# Altium PCB PCB1.PcbDoc
Units mm, origin at the board's own origin, x right, y up, seen from the top; angles counter-clockwise.
Board outline 83.19 x 63.37 mm, 2 copper layers (Top Layer, Bottom Layer); 32 components, 21 nets, 118 pads, 2 vias.
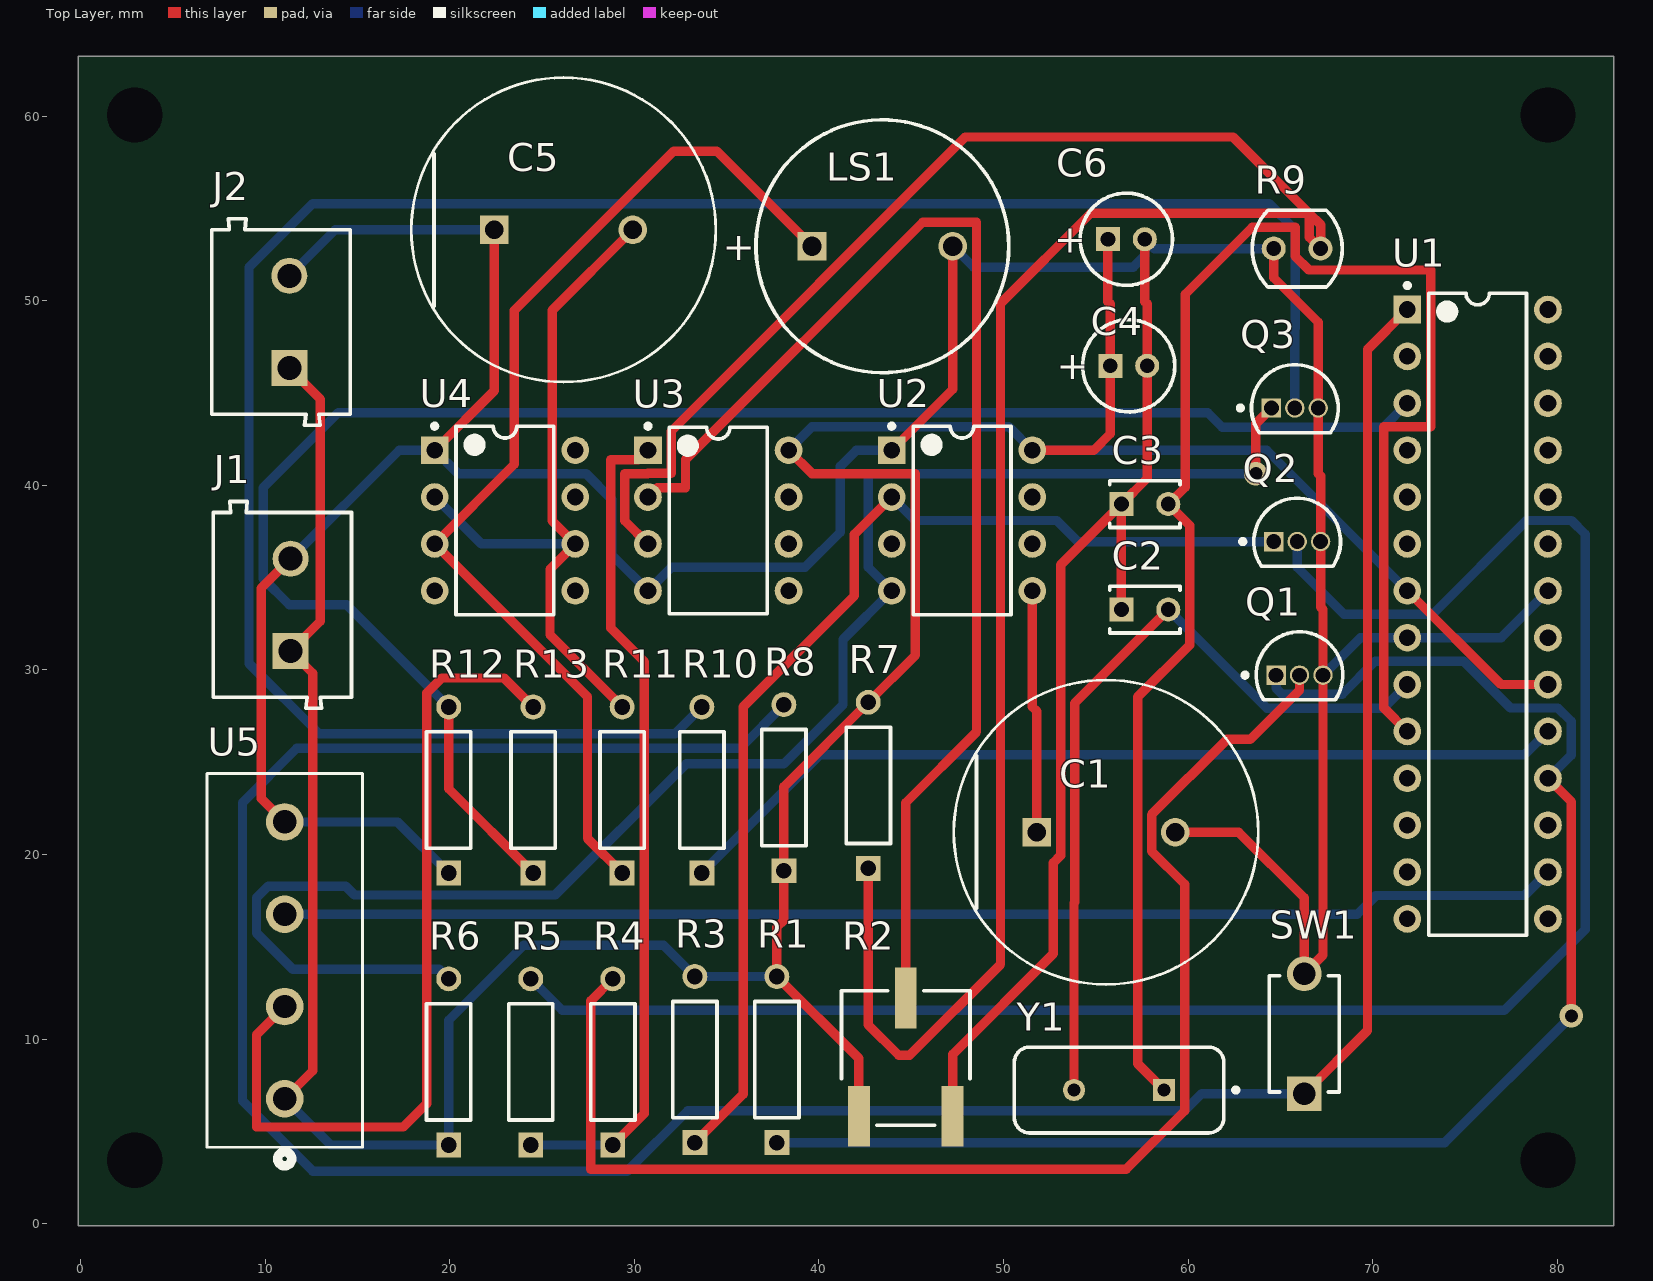
[diagram p0: Top Layer view]
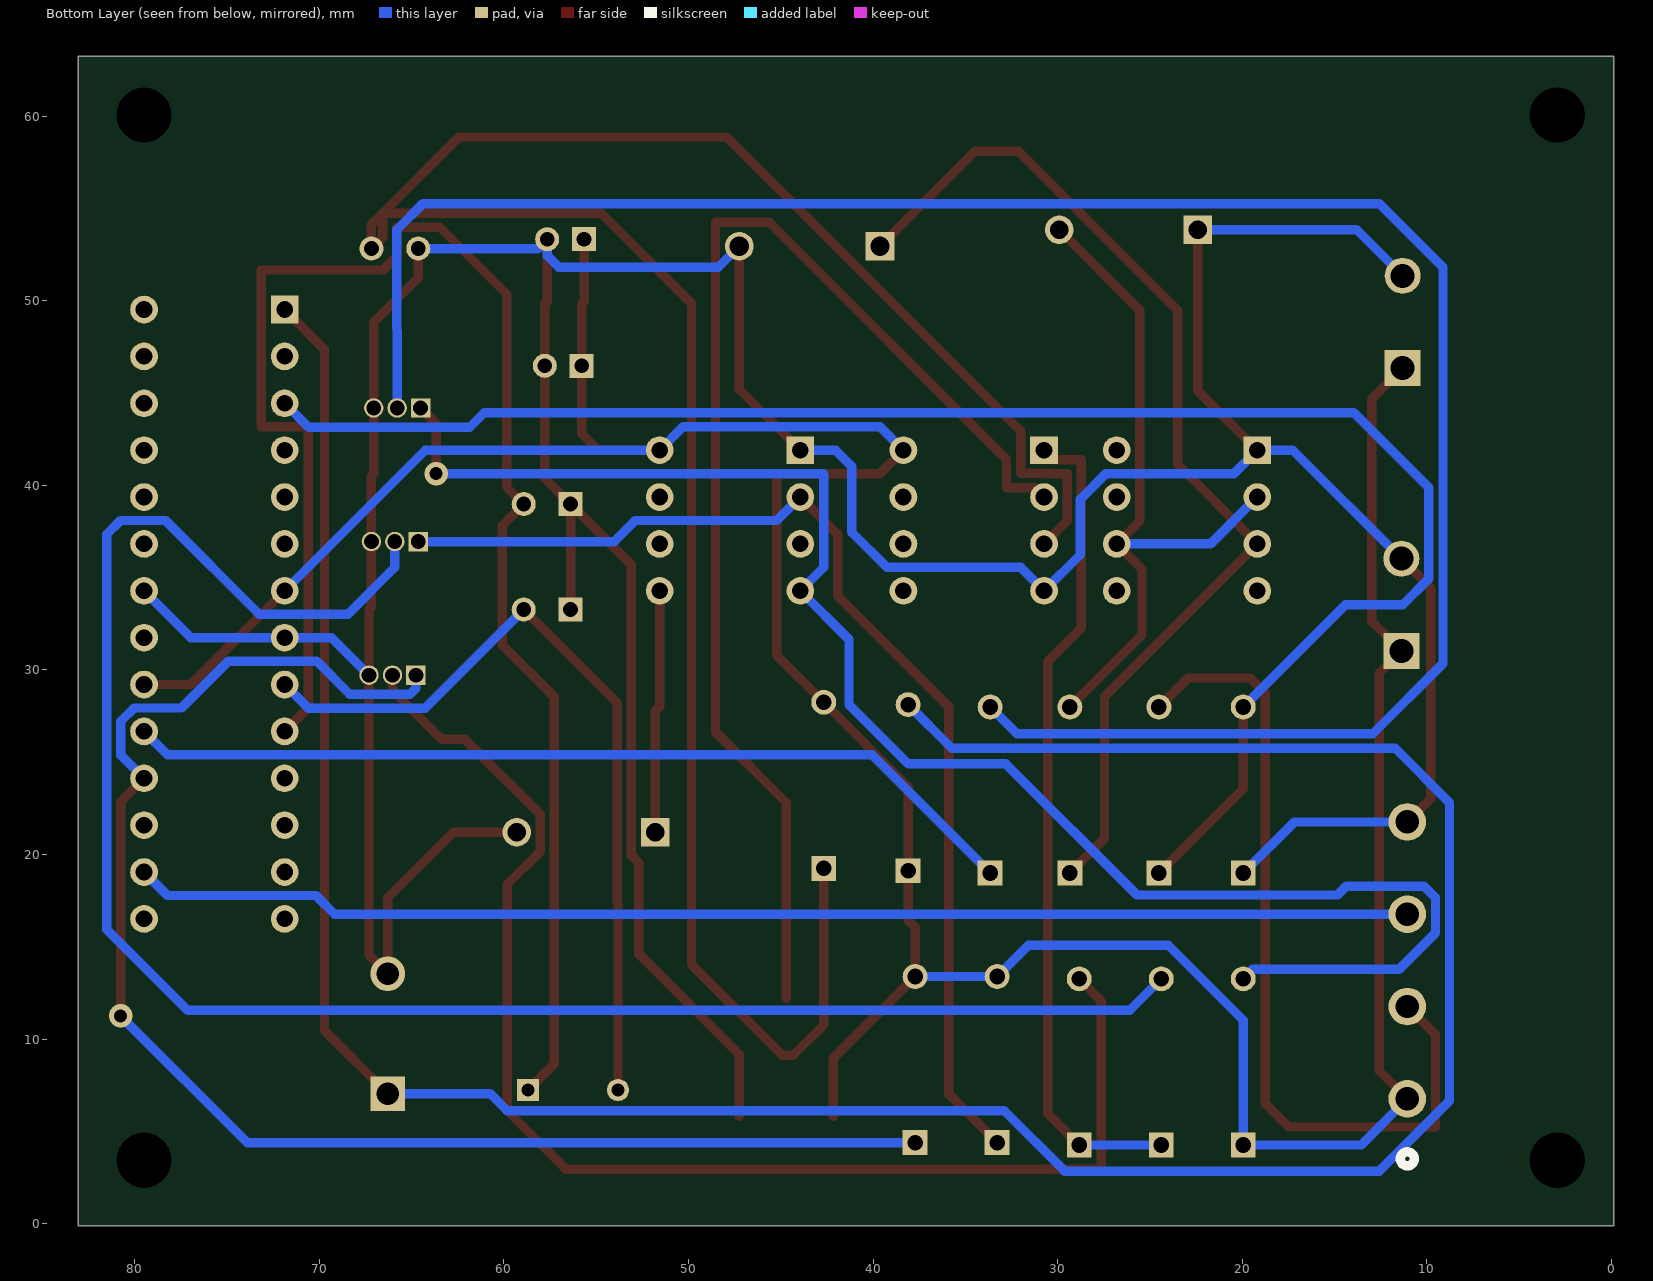
[diagram p1: Bottom Layer view, seen from below]

## Layer stack, top to bottom
Top Solder: solder mask 0.0102, Solder Resist, Dk 3.5
Top Layer: signal copper 0.0356
Dielectric 1: dielectric 0.32, FR-4, Dk 4.8
Bottom Layer: signal copper 0.0356
Bottom Solder: solder mask 0.0102, Solder Resist, Dk 3.5

## Board outline
-0.127,-0.127 83.058,-0.127 83.058,63.246 -0.127,63.246

## Design rules (kind name [scope] priority, off if disabled: settings)
Clearance [All] p1: gap=0.254 ignorepadtopadclearanceinfootprint=FALSE except(0: Arc-Hole Track-Hole SMDPad-Hole THPad-Hole Via-Hole Fill-Hole Poly-Hole Region-Hole Text-Hole)
PolygonConnect [All] p1: connectstyle=Relief reliefconductorwidth=0.254 reliefentries=4 polygonreliefangle="90 Angle" airgapwidth=0.254
RoutingVias [All] p1: holewidth=0.711 width=1.27 viastyle="Through Hole" minholewidth=0.711 minwidth=1.27 maxholewidth=0.711 maxwidth=1.27
SolderMaskExpansion [All] p1: expansion=0.102 istentingtop=FALSE
Width [All] p1: maxlimit=0.635 minlimit=0.508 preferedwidth=0.508 minimp=50.000000 maximp=50.000000 favimp=50.000000
30 further rules are at their usual default settings.

## Components (designator, comment, footprint, x,y, rotation, side; value= is the part's Value field where it differs from the comment)
C1 "EEUEE2G470" FP-RAD-TH-D_16_0_5-L_25_2-MFG 55.559,21.209 r0 top
C2 "C315C220K1G5TA" KEMT-C315-THT-2 57.658,33.274 r0 top
C3 "C315C220K1G5TA" KEMT-C315-THT-2 57.658,38.989 r0 top
C4 "ECA1HM100" CAPPR55-200-1100X500X1200 56.785,46.482 r0 top
C5 "EEUEE2G470" FP-RAD-TH-D_16_0_5-L_25_2-MFG 26.162,53.848 r0 top
C6 "ECA1HM100" CAPPR55-200-1100X500X1200 56.658,53.34 r0 top
J1 "691102710002" 691102710002 10.922,33.528 r90 top
J2 "691102710002" 691102710002 10.853,48.855 r90 top
LS1 "KPEG242" KINGS-KPEG242-2 43.434,52.959 r0 top
Q1 "BC547B" ONSC-TO-92-3-29-11 66.04,29.718 r0 top
Q2 "BC547B" ONSC-TO-92-3-29-11 65.913,36.957 r0 top
Q3 "BC547B" ONSC-TO-92-3-29-11 65.786,44.196 r0 top
R1 "MFR-25FBF52-47K5" RESA60-630X240 37.719,8.89 r90 top
R2 "3361P-1-103GLF" FP-3361P-MFG 44.704,9.017 r0 top
R3 "MFR-25FBF52-47K5" RESA60-630X240 33.274,8.89 r90 top
R4 "MFR-25FBF52-47K5" RESA60-630X240 28.829,8.763 r90 top
R5 "MFR-25FBF52-47K5" RESA60-630X240 24.384,8.763 r90 top
R6 "MFR-25FBF52-47K5" RESA60-630X240 19.939,8.763 r90 top
R7 "MFR-25FBF52-47K5" RESA60-630X240 42.672,23.749 r90 top
R8 "MFR-25FBF52-47K5" RESA60-630X240 38.1,23.622 r90 top
R9 "VT90N1" EXCE-VT90N1 65.913,52.832 r0 top
R10 "MFR-25FBF52-47K5" RESA60-630X240 33.655,23.495 r90 top
R11 "MFR-25FBF52-47K5" RESA60-630X240 29.337,23.495 r90 top
R12 "MFR-25FBF52-47K5" RESA60-630X240 19.939,23.495 r90 top
R13 "MFR-25FBF52-47K5" RESA60-630X240 24.511,23.495 r90 top
SW1 "1825965-1" FP-1825965-1-MFG 66.294,10.287 r90 top
U1 "ATMEGA328P-PU" ATML-28P3 75.692,33.02 r0 top
U2 "NE555P" P0008A 47.752,38.1 r0 top
U3 "LM358N" ONSC-PDIP-8-626-05_M 34.544,38.1 r0 top
U4 "NE555P" P0008A 22.987,38.1 r0 top
U5 "282836-4" 282836-4_TYC 11.049,6.764 r90 top
Y1 "FOXSLF/160-20" FOX-FOXSLF160-20 56.261,7.239 r180 top

## Footprints (in the part's own frame and the unit in brackets; to place one, negate y for a bottom-side part, rotate by r counter-clockwise, add the part's x,y. Pads: shape width x height; smd on the part's side, far side on the other; paste and mask are expansions set on the pad)
282836-4_TYC [mil]
  round 80 / inner round 60 / far side round 80 hole 50: 1(0,0) 2(196.85,0) 3(393.7,0) 4(590.55,0)
  silkscreen extent -143,-166 694,166, body extent 0,0 10,10, height 10
691102710002 [mm] "5,00mm - modular - blue - Horizontal entry with pressure clamp - 9,9 mm height - 02p"
  rect 1.95x1.95 hole 1.3: 1(-2.5,-0.45)
  round 1.95 hole 1.3: 2(2.5,-0.45)
  silkscreen extent -5.6,-3.75 5.6,3.75, body extent -5.6,-3.75 5.6,3.75, height 9.96
ATML-28P3 [mm] "DIP, 28-Leads, Body 34.8x7.2mm, Pitch 2.54mm"
  rect 1.5x1.5 hole 0.9: 1(-3.81,16.51)
  round 1.5 hole 0.9: 2(-3.81,13.97) 3(-3.81,11.43) 4(-3.81,8.89) 5(-3.81,6.35) 6(-3.81,3.81) 7(-3.81,1.27) 8(-3.81,-1.27) 9(-3.81,-3.81) 10(-3.81,-6.35) 11(-3.81,-8.89) 12(-3.81,-11.43) 13(-3.81,-13.97) 14(-3.81,-16.51) 15(3.81,-16.51) 16(3.81,-13.97) 17(3.81,-11.43) 18(3.81,-8.89) 19(3.81,-6.35) 20(3.81,-3.81) 21(3.81,-1.27) 22(3.81,1.27) 23(3.81,3.81) 24(3.81,6.35) 25(3.81,8.89) 26(3.81,11.43) 27(3.81,13.97) 28(3.81,16.51)
  silkscreen extent -3.93,-17.4 2.65,17.93, body extent -3.95,-17.4 3.95,17.4, height 4.58
CAPPR55-200-1100X500X1200 [mm] "THD, 2-Leads, Dia 5mm, Body Length 11mm"
  rect 1.3x1.3 hole 0.8: 1(-1,0)
  round 1.3 hole 0.8: 2(1,0)
  silkscreen extent -2.5,-2.5 2.5,2.5, body extent -2.5,-2.5 2.5,2.5, height 12
EXCE-VT90N1 [mm] "THD, 2-Leads, Body Width 4.17mm (Max), Height 2.29mm"
  round 1.3 hole 0.8: 1(-1.27,0) 2(1.27,0)
  silkscreen extent -2.44,-2.08 2.44,2.08, body extent -2.44,-2.09 2.44,2.09, height 2.29
FOX-FOXSLF160-20 [mm] "THD, 2-Leads, Body 11.35x4.65mm"
  rect 1.2x1.2 hole 0.7: 1(-2.44,0)
  round 1.2 hole 0.7: 2(2.44,0)
  silkscreen extent -6.45,-2.33 5.68,2.33, body extent -5.67,-2.32 5.68,2.33, height 3.6
FP-3361P-MFG [mm]
  rect 1.19x3.3 smd paste+0 mask+0: 1(-2.54,-3.2) 2(0,3.2) 3(2.54,-3.2)
  silkscreen extent -3.48,-3.69 3.48,3.6, body extent -3.58,-4.95 3.58,4.95, height 0.25
FP-1825965-1-MFG [mm]
  rect 1.89x1.89 hole 1.24 paste-1000 mask+0: 1(-3.25,0)
  round 1.89 hole 1.24 paste-1000 mask+0: 2(3.25,0)
  silkscreen extent -3.15,-1.9 3.15,1.9, body extent -4.3,-2 4.3,2, height 0.25
FP-RAD-TH-D_16_0_5-L_25_2-MFG [mm]
  rect 1.55x1.55 hole 1 paste-1000 mask+0: 1(-3.75,0)
  round 1.55 hole 1 paste-1000 mask+0: 2(3.75,0)
  silkscreen extent -8.25,-8.25 8.25,8.25, body extent -8.35,-8.35 8.35,8.35, height 0.25
KEMT-C315-THT-2 [mm] "THD, 2-Leads, Body 3.81x2.54mm"
  rect 1.3x1.3 hole 0.8: 1(-1.27,0)
  round 1.3 hole 0.8: 2(1.27,0)
  silkscreen extent -1.91,-1.27 1.91,1.27, body extent -1.91,-1.27 1.91,1.27, height 4.66
KINGS-KPEG242-2 [mm] "THD, 2-Leads, Dia 13.7mm, Pitch 7.62mm"
  rect 1.55x1.55 hole 1.05: 1(-3.81,0)
  round 1.55 hole 1.05: 2(3.81,0)
  silkscreen extent -6.85,-6.85 6.85,6.85, body extent -6.85,-6.85 6.85,6.85, height 7.6
ONSC-PDIP-8-626-05_M [mm] "DIP, 8-Leads, Body 10x7.1mm, Pitch 2.54mm"
  rect 1.5x1.5 hole 0.9: 1(-3.81,3.81)
  round 1.5 hole 0.9: 2(-3.81,1.27) 3(-3.81,-1.27) 4(-3.81,-3.81) 5(3.81,-3.81) 6(3.81,-1.27) 7(3.81,1.27) 8(3.81,3.81)
  silkscreen extent -3.93,-5.05 2.65,5.23, body extent -3.95,-5 3.95,5, height 5.33
ONSC-TO-92-3-29-11 [mm] "TO, 3-Leads, Body Dia 4.7mm, Pitch 1.27mm"
  rect 1.05x1.05 hole 0.8: 1(-1.27,0)
  round 1.05 hole 0.8: 2(0,0) 3(1.27,0)
  silkscreen extent -3.07,-1.34 2.35,2.35, body extent -2.35,-1.33 2.36,2.36, height 7.87
P0008A [mm] "DIP, 8-Leads, Body 10.15x6.6mm, Pitch 2.54mm"
  rect 1.5x1.5 hole 0.9: 1(-3.81,3.81)
  round 1.5 hole 0.9: 2(-3.81,1.27) 3(-3.81,-1.27) 4(-3.81,-3.81) 5(3.81,-3.81) 6(3.81,-1.27) 7(3.81,1.27) 8(3.81,3.81)
  silkscreen extent -3.93,-5.1 2.65,5.23, body extent -3.95,-5.07 3.95,5.07, height 5.08
RESA60-630X240 [mm] "Axial Resistor, 2-Leads, Dia 2.4mm, Body Length 6.3mm"
  rect 1.35x1.35 hole 0.85: 1(-4.5,0)
  round 1.35 hole 0.85: 2(4.5,0)
  silkscreen extent -3.15,-1.2 3.15,1.2, body extent -3.15,-1.2 3.15,1.2, height 2.4

## Part data
C1 C5: library part CMP-05427-001116-1, "Aluminum Electrolytic Capacitors (Radial Lead Type) 47uF ±20% 400V", Capacitance=47uF, Case/Package=Radial, Dielectric Material=Aluminium, Leakage Current=1.138mA, Max Operating Temperature=105°C, Min Operating Temperature=-25°C, Package Quantity=100, Ripple Current=1.18A, Tolerance=20%, Voltage=400V, Construction=RADIAL, Diameter=16mm, Dissipation Factor=0.24%, Height=25mm, Height - Seated (Max)=0.984inch, Lead Diameter=0.8mm, Lead Free="Lead Free", Lead Pitch=7.5mm, Length=25mm, Life (Hours)=10000Hour, Mount="Through Hole", Number of Pins=2, Packaging=Bulk, Radiation Hardening=No, REACH SVHC="No SVHC", Ripple Current (AC)=1.18A, RoHS Compliant=Yes, Series=EE, Termination=Radial, Voltage Rating=400V, Voltage Rating (DC)=400V
C2 C3: library part CMP-1664-00008-1, "Capacitor, Ceramic, 22 pF, +/-10 %, 100 V, -55 to 125 degC, 2-Pin THD, RoHS, Bulk", Case\Package=TO-220, Max Input Voltage="40 V", Max Operating Temperature="125 degC", Max Ouput Current="1.5 A", Min Input Voltage="4.2 V", Min Operating Temperature="0 degC", Output Voltage="1.2 V", Package Quantity=50, ComponentLink1Description="Manufacturer URL", ComponentLink1URL=http://www.kemet.com/, ComponentLink2Description=Datasheet, ComponentLink2URL=http://capacitoredge.kemet.com/capedge2/DataSheet/Datasheet-C315C220K1G5TA.pdf?pn=C315C220K1G5TA{BULK}, DatasheetVersion=Aug-16, Height="9.28 mm", Length="10.28 mm", Mount="Through Hole", Output Current="1.5 A", Outputs=1, PackageDescription="2-Pin Through Hole Device, Body 3.81 x 2.54 mm", PackageReference=C315-THT-2, Packaging=Rail/Tube, Pins=3, Radiation Hardening=No, REACH SVHC="No SVHC", RoHSCompliant=true, Weight="0.08113 oz", Width="4.82 mm"
C4 C6: library part CMP-1665-00038-2, "Aluminum Electrolytic Capacitor, 10 uF, +/- 20%, 50 V, -40 to 85 degC, 2-Pin THD, RoHS, Bulk", Capacitance=10uF, Case/Package=Radial, Dielectric Material=Aluminium, Leakage Current=3uA, Manufacturer=Panasonic, Max Operating Temperature=85degC, Min Operating Temperature=-40degC, Package Description="2-Pin Radial Lead, Dia 5 mm, Height 12 mm", Package Quantity=200, Package Reference=CAPPR55-200-1100X500X1200, Ripple Current=65mA, Tolerance=20%, Voltage=50V, Datasheet URL=https://industrial.panasonic.com/cdbs/www-data/pdf/RDF0000/ABA0000C1218.pdf, Datasheet Version="Rev. 05, 10/2016", Diameter=5mm, Dissipation Factor=0.12%, Height=11mm, Height - Seated (Max)=0.472inch, Lead Diameter=0.5mm, Lead Free=LeadFree, Lead Pitch=2mm, Lead/Base Style=Straight, Length=11mm, Life (Hours)=2000Hour, Manufacturer URL=http://www.panasonic.com/, Mount=ThroughHole, Number of Pins=2, Packaging=Bulk, Radiation Hardening=No, REACH SVHC=NoSVHC, Ripple Current (AC)=65mA, RoHSCompliant=true, Termination=Radial, Voltage Rating=50V, Voltage Rating (DC)=50V
J1 J2: library part CMP-1502-03258-1, "Series 102 - 5.00 mm Horizontal Entry Modular with Pressure Clamp WR-TBL, 2 pin", Manufacturer="Wurth Elektronik", Operating Temperature=-40to105degC, Datasheet URL=http://katalog.we-online.de/em/datasheet/6911027100xx.pdf, Manufacturer URL=http://www.we-online.de, Mounting Technology=THT, Package Reference=691102710002, Packaging=Box, Part Number=691102710002, Pin Number=2, Pitch=5.00mm, Publisher=WurthElektronik
LS1: library part CMP-2000-06518-1, "Piezo Indicator, 4100 Hz, 3 to 16 V, -20 to 70 degC, 2-Pin THD, RoHS", Current - Max=7A, Frequency Range=3600to4600Hz, Manufacturer=KingstateElectronicsCorp., Maximum Resonant Frequency=4600Hz, Maximum Supply Current=7mA, Operating Temperature=-20to70°C, Package Description="2-Pin Through Hole Device, Body Dia 13.7 mm, Pitch 7.62 mm", PartNumber=KPE-242, Typical Operating Supply Voltage=12Vdc, Category=AudioIndicatorsandAlerts, Datasheet URL=https://datasheet.ciiva.com/11776/0900766b8068f3a2-11776713.pdf, Datasheet Version=01/2006, Manufacturer URL=http://www.kingstate.com.tw/index.php/en/, Minimum Sound Pressure=70dBA, Mounting=ThroughHole, Mounting Technology=ThroughHole, Package Reference=KPEG242, Product Diameter=13.7mm, Product Height=7.6mm, Technology=Piezo, Termination Method=Pin, Tone Mode=Continuous, Type=Indicator
Q1 Q2 Q3: library part CMP-1048-01467-1, "Amplifier Transistor, NPN Silicon, 3-Pin TO-92, Bulk Box", Manufacturer="On Semiconductor", ComponentLink1Description="Manufacturer URL", ComponentLink1URL=http://www.onsemi.com/, ComponentLink2Description=Datasheet, ComponentLink2URL=http://www.onsemi.com/pub_link/Collateral/BC546-D.PDF, ComponentLink3Description="Package Specification", ComponentLink3URL=http://www.onsemi.cn/pub_link/Collateral/2N6426-D.PDF, DatasheetVersion="Rev. 7", fT Min (MHz)=150, IC Continuous (A)=0.1, Mounting Technology="Through Hole", PackageDescription="3-Pin Transistor Outline, Body 4.825 x 3.685 mm, Pitch 1.27 mm", PackageReference=TO-92-3-29-11_AM_SL, PackageVersion="Rev. AM", Packing="Bulk Box", PartNumber=BC547B, Polarity=NPN, RoHS=FALSE
R1 R3 R4 R5 R6 R7 R8 R10 R11 R12 R13: library part CMP-1659-00063-1, "Axial Resistor, 47.5 KOhm, +/- 1%, 0.25 W, -55 to 155 degC, 2-Pin THD, RoHS, Bulk", Case Code (Metric)=2520, Case\Package=1008, Current Rating="1.3 A", Max Operating Temperature="125 degC", Min Operating Temperature="-55 degC", Package Quantity=3000, Tolerance=20%, ComponentLink1Description="Manufacturer URL", ComponentLink1URL=http://www.yageo.com/, ComponentLink2Description=Datasheet, ComponentLink2URL=http://www.yageo.com/documents/recent/Yageo%20LR_MFR_2013.pdf, DatasheetVersion=Apr-13, Height="1.2 mm", Length="2.5 mm", Mount="Surface Mount", PackageDescription="2-Pin Axial Lead, Dia 2.4 mm, Body Length 6.3 mm", PackageReference=MFR-25, Packaging="Tape and Reel", Radiation Hardening=No, RoHSCompliant=true, Shielding=Shielded, Width="2 mm"
R2: library part CMP-07234-000045-1, "TRIMMER 10K OHM 0.5W GW TOP ADJ", Color=Natural, Max Operating Temperature=125°C, Max Power Dissipation=500mW, Min Operating Temperature=-55°C, Package Quantity=1, Resistance=10kR, Resistance Tolerance=10%, Resistor Type=Cermet, Temperature Coefficient=100ppm/°C, Voltage Rating=300V, Contact Plating=Tin, Depth=8.53mm, Height=0.205inch, Lead Free="Lead Free", Length=6.71mm, Military Standard=Not, Mount="Surface Mount", Number of Turns=1, Packaging="Tape and Reel", Power Rating=500mW, Radiation Hardening=No, REACH SVHC="No SVHC", RoHS Compliant=Yes, Series="Trimpot® 3361 - Sealed", Taper=Linear, Technology=CERMET, Termination="Gull Wing", Tolerance=10%, Voltage Rating (DC)=300V, Weight=0.567g, Width=0.264inch
R9: library part CMP-2000-07406-1, "Photoconductive Resistor, 200 kOhm, 100 V, 80 mW, -40 to 75 degC, 2-Pin THD, RoHS", Dark Resistance=200kohm, Manufacturer="Excelitas Technology", Operating Temperature Max=75°C, Operating Temperature Min=-40°C, Package Description="2-Pin Through Hole Device, Body Width 4.17 mm (Max), Height 2.29 mm", Power Rating=80mW, Resistance @ Lux=12kohm, Resistor Case Style=-, Voltage Rating=100V, Datasheet URL=http://datasheet.octopart.com/VT90N1-Excelitas-datasheet-10388451.pdf, Datasheet Version=09/2006, Manufacturer URL=http://www.excelitas.com/Pages/Index.aspx, Mounting Technology=ThroughHole, Package Reference=VT90N1, Packaging=Each, Product Range=-, SVHC=Cadmiumchloride(15-Jun-2015)
SW1: library part CMP-03407-000024-1, "SWITCH TACTILE SPST-NO 0.05A 24V", Contact Current Rating=50mA, Contact Resistance=100mR, Max Operating Temperature=105°C, Max Voltage Rating (DC)=24V, Min Operating Temperature=-35°C, Operating Force=1.3N, Package Quantity=1000, Actuator Length=1.52mm, Actuator Material=PBT, Contact Material="Copper Alloy", Contact Plating=Silver, Depth=6.5mm, Electrical Life=20000Cycles, ELV=Compliant, Illumination Type=Non-Illuminated, Lead Free="Lead Free", Length=3.5mm, Max Current Rating=50mA, Mechanical Life=100000Cycles, Mount="Through Hole", Orientation=Straight, Packaging="Loose Piece", RoHS Compliant=Yes, Series="FSM, Alcoswitch", Switch Function=Off-Mom, Switch Travel=0.25mm, Termination="PC Pins", Throw Configuration=SPST, Type=Switch, Voltage Rating (DC)=24V
U1: library part CMP-020-00004-3, "8-Bit Microcontroller with 32 KBytes In-System Programmable Flash, 23 I/Os, -40 to 85 degC, 28-Pin PDIP (28P3), RoHS, Tube", Case/Package=DIP, Manufacturer=Atmel, Max Clock Frequency=20MHz, Max Operating Temperature=85°C, Max Supply Voltage=5.5V, Min Operating Temperature=-40°C, Min Supply Voltage=1.8V, Package Description="28-Pin Plastic Dual Inline Package, Body 34.671 x 7.3025 mm, Pitch 2.54 mm", Package Quantity=14, Package Reference=28P3, Package Version="Rev. B, 09/2001", Datasheet URL=http://www.atmel.com/images/Atmel-8271-8-bit-AVR-Microcontroller-ATmega48A-48PA-88A-88PA-168A-168PA-328-328P_datasheet_Complete.pdf, Datasheet Version="Rev. 8271J, 11/2015", Density=32KB, Ethernet Channels=0, I/Os=23, Interface=USART, Manufacturer URL=http://www.atmel.com/, Mounting Technology=TH, Package URL=http://www.atmel.com/images/Atmel-8271-8-bit-AVR-Microcontroller-ATmega48A-48PA-88A-88PA-168A-168PA-328-328P_datasheet_Complete.pdf, Packaging=Rail/Tube, Pins=28, RAM Size=2KB, RoHS Compliant=True
U2 U4: library part CMP-2000-04954-1, "Precision Timer, 4.5 to 16 V, 0 to 70 degC, 8-Pin DIP, Pb-Free, Tube", Manufacturer=TexasInstruments, Maximum High Level Output Current=-200mA, Maximum Low Level Output Current=200mA, Operating Supply Voltage=5, Package=8PDIP, Package Description="8-Pin Double In-line Package, Body 9.59 x 6.35 mm, Pitch 2.54 mm", Package Reference=P8, Category=Timer, Datasheet URL=http://www.ti.com/general/docs/lit/getliterature.tsp?genericPartNumber=NE555&fileType=pdf, Datasheet Version="Rev. I, 09/2014", Manufacturer URL=http://www.ti.com/, Number of Internal Timers=1, Package URL=http://www.ti.com/lit/ml/mpdi001b/mpdi001b.pdf, Packaging=Rail/Tube, Rad Hard=No, Type=Standard
U3: library part CMP-1310-00098-1, "Single Supply Dual Operational Amplifier, 3 to 32 V, 0 to 70 degC, 8-Pin PDIP, Tube", Manufacturer="On Semiconductor", ComponentLink1Description="Manufacturer URL", ComponentLink1URL=http://www.onsemi.com/, ComponentLink2Description=Datasheet, ComponentLink2URL=http://www.onsemi.cn/pub_link/Collateral/LM358-D.PDF, ComponentLink3Description="Package Specification", ComponentLink3URL=http://www.onsemi.com/pub_link/Collateral/LM211-D.PDF, DatasheetVersion="Rev. 27", Mounting Technology="Through Hole", PackageDescription="8-Pin Plastic Dual-In Line Package, Body 9.52 x 6.605 mm, Pitch 2.54 mm", PackageReference=PDIP-8-626-05, PackageVersion="Rev. M, 04/2010", Packing=Tube, PartNumber=LM358N, RoHS=FALSE, VCC Max (V)=32, VCC Min (V)=3
U5: "No Description Available", Mfr_Name="TE Connectivity", RefDes=RefDes, Type=Type
Y1: library part CMP-1749-00003-1, "Resistance Weld Thru-Hole Crystal, 16 MHz, -20 to 70 degC, 2-Pin THD, RoHS, Bulk", Case\Package=Axial, Max Operating Temperature="155 degC", Min Operating Temperature="-55 degC", Package Quantity=200, Power Rating="250 mW", Resistance="221 kohm", Tolerance=1%, Voltage Rating="250 V", ComponentLink1Description="Manufacturer URL", ComponentLink1URL=http://www.foxonline.com/, ComponentLink2Description=Datasheet, ComponentLink2URL=http://www.foxonline.com/pdfs/hc49slf.pdf, DatasheetVersion=Mar-15, Length="0.248 inch", Mount="Through Hole", PackageDescription="2-Pin Through Hole Device, Body 11.35 x 4.65 mm", PackageReference=FOXSLF160-20, Packaging=Bulk, RoHSCompliant=true

## Free pads (board coordinates)
  round 0 hole 3 unplated: 13(2.921,3.429) 14(79.502,3.429) 15(79.502,60.071) 16(2.921,60.071)

## Via types
v1: diameter 1.27, hole 0.711, Top Layer to Bottom Layer, 2 vias

## Nets (pads, with @x,y where several pads share a name; then routed paths per layer and width w, separated by ;. In a path a pad name is that pad's centre, name@x,y a point inside that pad or via, vN(x,y) a via of type N, cw(c..) or ccw(c..) an arc to the next point about the centre after c; other vN are vias at no path point)
GND: C1.2 C2.1 C3.1 C4.2 C5.1 C6.2 J1.2 J2.2 LS1.2 Q1.3 Q2.3 Q3.3 R2.3 R9.1 R12.1 SW1.2 U1.8 U1.22 U2.1 U3.4 U4.1 U5.4 | length 252.9
  Top Layer w0.508: U5.4 9.779,23.034 9.779,34.435 J1.2 ; U4.1 22.412,45.145 C5.1 ; U2.1 47.244,45.212 LS1.2 ; R2.3 47.244,9.169 52.705,14.63 52.705,19.558 53.092,19.945 53.092,35.693 C3.1 ; C2.1 C3.1 ; C6.2 57.658,49.962 57.785,49.835 C4.2 57.785,40.386 C3.1 ; C1.2 62.738,21.209 66.294,17.653 SW1.2 67.31,14.553 Q1.3 67.31,33.274 67.183,33.401 Q2.3 67.183,40.513 67.056,40.64 Q3.3 67.056,48.836 64.643,51.249 R9.1
  Bottom Layer w0.508: U5.4 17.17,21.764 R12.1 ; J2.2 13.796,53.848 C5.1 ; J1.2 17.254,41.91 U4.1 20.447,40.64 27.381,40.64 28.778,39.243 28.778,36.246 U3.4 32.004,35.56 39.243,35.56 41.148,37.465 41.148,41.03 42.028,41.91 U2.1 ; LS1.2 48.387,51.816 57.023,51.816 57.658,52.451 C6.2 58.166,52.832 R9.1 ; Q1.3 69.342,31.75 U1.8 76.962,31.75 U1.22
NetC1_1: C1.1 U2.5 | length 13.2
  Top Layer w0.508: U2.5 51.562,28.009 51.809,27.762 C1.1
NetC2_2: C2.2 U1.9 Y1.2 | length 43.9
  Top Layer w0.508: Y1.2 53.821,17.39 53.854,17.423 53.854,28.2 C2.2
  Bottom Layer w0.508: C2.2 64.279,27.923 70.595,27.923 U1.9
NetC3_2: C3.2 U1.10 Y1.1 | length 90.5
  Top Layer w0.508: Y1.1 57.264,8.676 57.264,28.532 60.086,31.354 60.086,37.831 C3.2 59.842,39.903 59.842,50.358 63.475,53.99 65.801,53.99 65.801,52.421 66.548,51.674 73.142,51.674 73.152,51.664 73.152,43.18 70.612,43.18 70.612,27.94 U1.10
NetC5_2: C5.2 R11.2 U4.2 U4.6 | length 39
  Top Layer w0.508: R11.2 25.425,31.907 25.425,35.458 U4.6 25.539,38.088 25.539,49.475 C5.2
  Bottom Layer w0.508: U4.2 21.717,36.83 U4.6
NetLS1_1: LS1.1 R11.1 U4.3 | length 58.3
  Top Layer w0.508: R11.1 27.457,20.875 27.457,28.55 U4.3 23.495,41.148 23.495,49.479 32.131,58.115 34.468,58.115 LS1.1
NetQ1_1: Q1.1 R1.1 U1.18 | length 81.8
  Top Layer w0.508: U1.18 80.772,22.86 v1(80.772,11.252)
  Bottom Layer w0.508: R1.1 73.91,4.39 v1(80.772,11.252) ; Q1.1 64.77,29.007 65.092,28.685 68.351,28.685 70.146,30.48 74.93,30.48 77.47,27.94 80.035,27.94 80.76,27.215 80.76,25.388 U1.18
NetQ1_2: Q1.2 R4.2 | length 72.7
  Top Layer w0.508: R4.2 27.635,12.069 27.635,2.946 56.642,2.946 59.817,6.121 59.817,18.39 58.026,20.181 58.026,22.161 62.103,26.238 63.373,26.238 66.04,28.905 Q1.2
NetQ2_1: Q2.1 R3.1 U2.2 | length 61.1
  Top Layer w0.508: R3.1 35.89,7.006 35.89,27.991 41.922,34.023 41.922,37.35 U2.2
  Bottom Layer w0.508: U2.2 45.212,38.1 52.883,38.1 54.026,36.957 Q2.1
NetQ2_2: Q2.2 R5.2 | length 101.5
  Bottom Layer w0.508: R5.2 26.09,11.557 77.14,11.557 81.522,15.939 81.522,37.35 80.772,38.1 78.334,38.1 73.254,33.02 68.453,33.02 65.913,35.56 Q2.2
NetQ3_1: Q3.1 R6.2 U2.4 | length 88.9
  Top Layer w0.508: v1(63.678,40.64) 63.678,43.358 Q3.1
  Bottom Layer w0.508: R6.2 19.41,13.792 11.481,13.792 9.525,15.748 9.525,17.653 10.16,18.288 14.351,18.288 14.834,17.805 25.705,17.805 32.81,24.91 38.093,24.91 41.3,28.118 41.3,31.648 U2.4 42.672,35.56 42.672,40.603 42.709,40.64 v1(63.678,40.64)
NetQ3_2: Q3.2 R10.2 | length 116.5
  Bottom Layer w0.508: R10.2 32.203,26.543 12.929,26.543 9.119,30.353 9.119,51.816 12.573,55.27 64.389,55.27 65.811,53.848 65.811,52.654 Q3.2
NetR2_2: R2.2 U3.2 | length 68.5
  Top Layer w0.508: U3.2 31.242,39.878 32.766,39.878 32.766,41.402 45.618,54.254 48.539,54.254 48.539,26.645 44.704,22.809 R2.2
NetR4_1: R4.1 R5.1 U3.1 | length 45.3
  Top Layer w0.508: R4.1 30.531,5.965 30.531,30.455 28.714,32.271 28.714,41.39 30.214,41.39 U3.1
  Bottom Layer w0.508: R5.1 R4.1
NetR7_1: R7.1 R9.2 U3.3 | length 129.3
  Top Layer w0.508: U3.3 29.476,38.088 29.476,40.628 30.71,40.628 30.734,40.652 31.992,40.652 31.992,42.939 47.93,58.877 62.438,58.877 66.563,54.752 ; R7.1 42.672,10.77 44.323,9.119 44.907,9.119 49.835,14.046 49.835,49.86 54.727,54.752 66.563,54.752 ; 66.563,54.752 67.183,54.132 R9.2 66.563,53.452 66.563,54.752
NetR8_2: R8.2 SW1.1 U1.1 | length 153.3
  Top Layer w0.508: SW1.1 69.723,10.466 69.723,47.371 U1.1
  Bottom Layer w0.508: R8.2 35.734,25.756 11.709,25.756 8.763,22.809 8.763,6.655 12.573,2.845 29.616,2.845 32.893,6.121 59.817,6.121 60.733,7.037 SW1.1
NetR10_1: R10.1 U1.19 | length 49
  Bottom Layer w0.508: R10.1 40.06,25.4 78.232,25.4 U1.19
NetR12_2: R12.2 R13.1 U1.3 | length 93.3
  Top Layer w0.508: R12.2 19.939,23.567 R13.1
  Bottom Layer w0.508: R12.2 14.406,33.528 11.303,33.528 9.881,34.95 9.881,39.878 13.945,43.942 61.062,43.942 61.849,43.155 70.587,43.155 U1.3
NetR13_2: R13.2 U5.2 | length 45.9
  Top Layer w0.508: U5.2 9.525,10.24 9.525,5.232 17.475,5.232 18.745,6.502 18.745,28.753 19.558,29.566 22.94,29.566 R13.2
NetU1_16: U1.16 U5.3 | length 69.4
  Bottom Layer w0.508: U5.3 69.164,16.764 70.18,17.78 78.232,17.78 U1.16
VCC: C4.1 C6.1 J1.1 J2.1 R1.2 R2.1 R3.2 R6.1 R7.2 R8.1 U1.7 U1.20 U2.8 U3.8 U5.1 | length 188.7
  Top Layer w0.508: U5.1 12.573,8.288 12.573,29.827 J1.1 12.979,32.635 12.979,44.679 J2.1 ; U3.8 39.624,40.64 45.212,40.64 45.212,30.789 R7.2 38.1,23.677 R8.1 38.1,16.434 37.719,16.053 R1.2 42.164,8.945 R2.1 ; U2.8 54.896,41.91 55.785,42.799 C4.1 55.785,49.835 55.658,49.962 C6.1 ; U1.7 76.962,29.21 U1.20
  Bottom Layer w0.508: U5.1 13.55,4.263 R6.1 19.939,11.024 24.003,15.088 31.576,15.088 R3.2 R1.2 ; U3.8 39.624,43.18 50.292,43.18 U2.8 64.262,41.91 U1.7
pads on no net: U1.2 U1.4 U1.5 U1.6 U1.11 U1.12 U1.13 U1.14 U1.15 U1.17 U1.21 U1.23 U1.24 U1.25 U1.26 U1.27 U1.28 U2.3 U2.6 U2.7 U3.5 U3.6 U3.7 U4.4 U4.5 U4.7 U4.8

## Text inside footprints (layer, text, board x,y; h text height)
C4: Top Overlay "+" at 52.877,45.745 h1.5
C6: Top Overlay "+" at 52.75,52.603 h1.5
LS1: Top Overlay "+" at 34.798,52.197 h1.52